# Altium PCB neuroILO_C.PcbDoc
Units mil, origin at the board's own origin, x right, y up, seen from the top; angles counter-clockwise.
Board outline 2000 x 1000 mil, 2 copper layers (Top Layer, Bottom Layer), stack 61.8 mil thick; 20 components, 11 nets, 55 pads, 136 vias.
Unrouted connection lines stored in the file: 5.
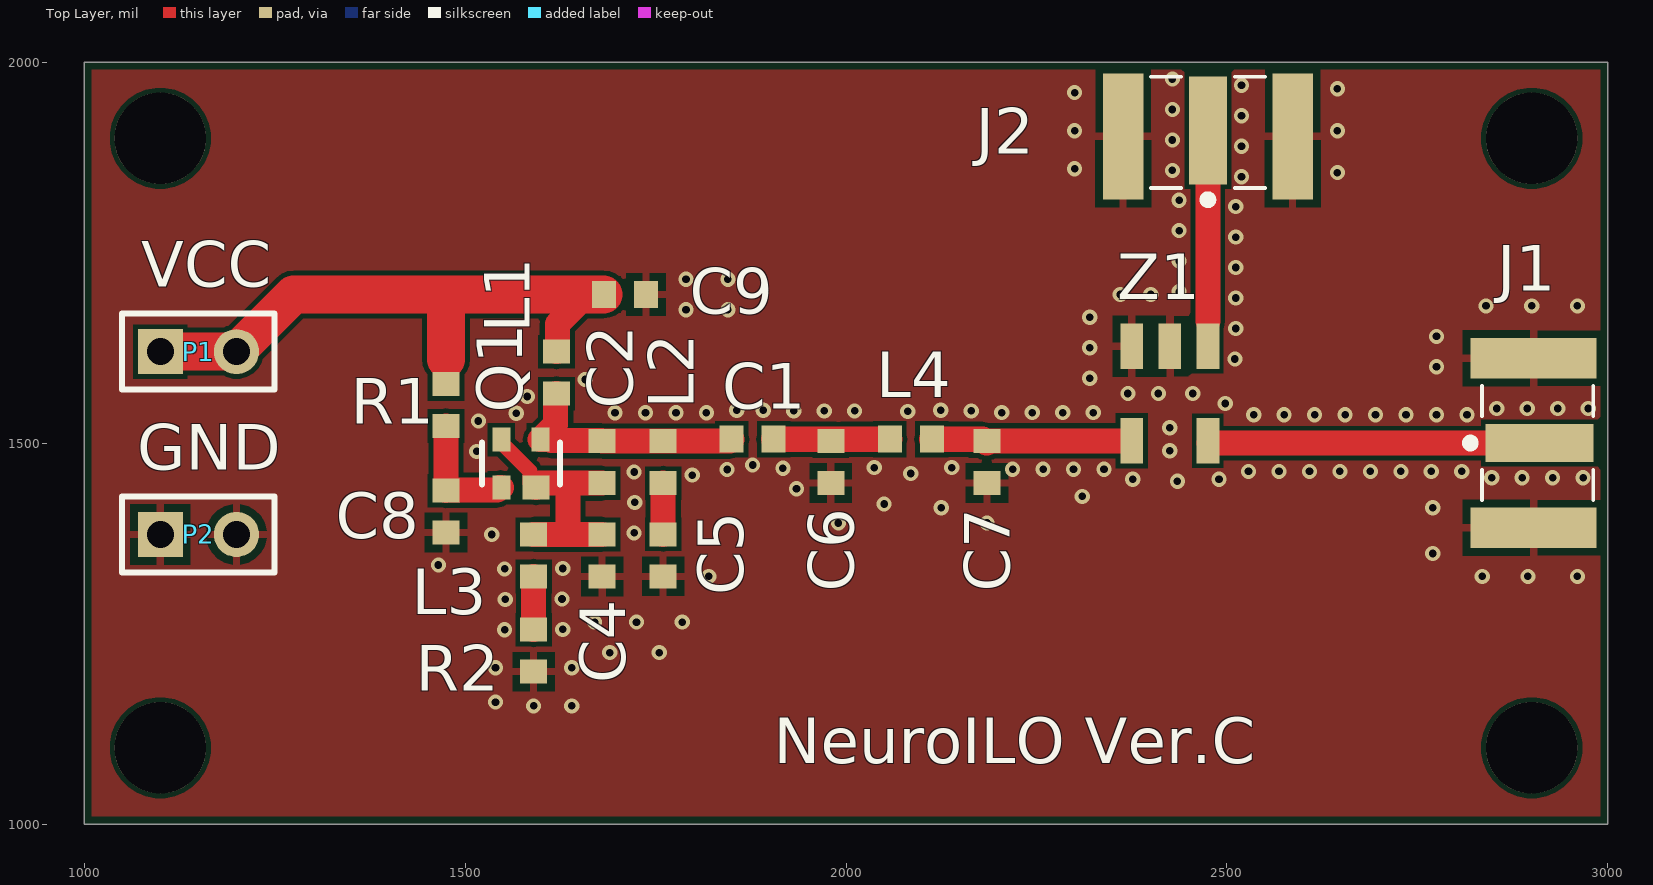
[diagram p0: Top Layer view]
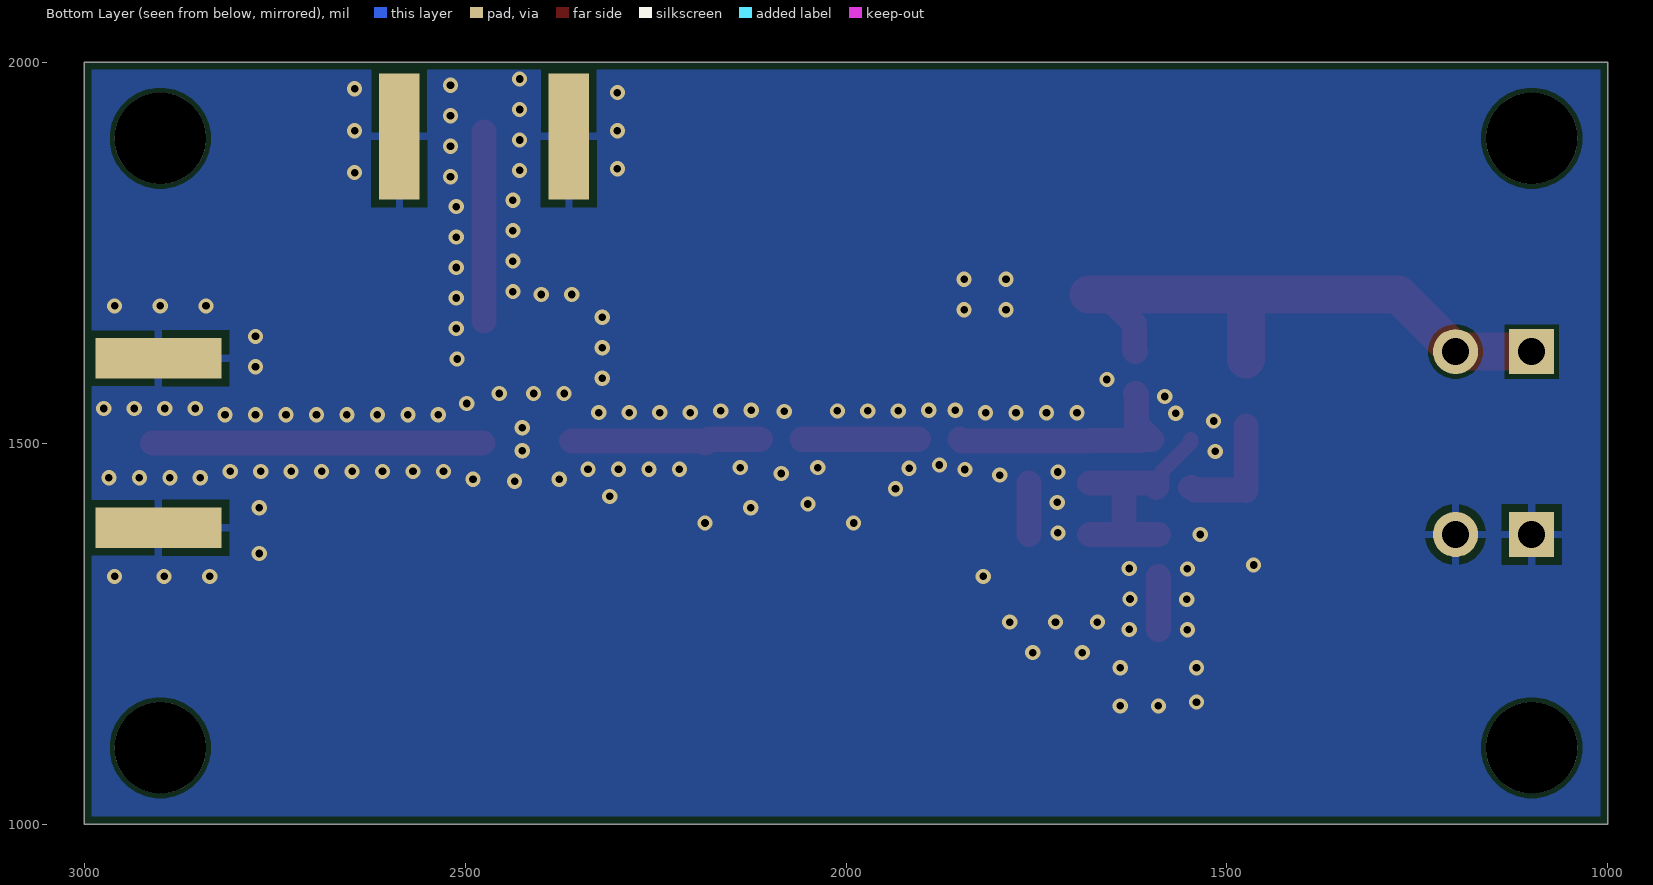
[diagram p1: Bottom Layer view, seen from below]

## Layer stack, top to bottom
Top Solder: solder mask 0.4, Solder Resist, Dk 3.5
Top Layer: signal copper 1.4
Dielectric 1: core 59, Core-043, Dk 4.3
Bottom Layer: signal copper 1.4
Bottom Solder: solder mask 0.4, Solder Resist, Dk 3.5

## Board outline
1000,1000 3000,1000 3000,2000 1000,2000

## Design rules (kind name [scope] priority, off if disabled: settings)
BoardOutlineClearance [All] p1: gap=10 ignorepadtopadclearanceinfootprint=FALSE except(0: Arc-SplitContinuation Track-SplitContinuation SMDPad-SplitContinuation THPad-SplitContinuation Via-SplitContinuation Fill-SplitContinuation Poly-SplitContinuation Region-SplitContinuation Text-SplitContinuation)
Clearance [All] p1: gap=6 ignorepadtopadclearanceinfootprint=FALSE
HoleSize [All] p1: absolutevalues=TRUE maxlimit=120 minlimit=1 maxpercent=80.000 minpercent=20.000
MinimumSolderMaskSliver [All] p1: minsoldermaskwidth=4
PolygonConnect [All] p1: thpad.connectstyle=Relief thpad.reliefconductorwidth=10 thpad.reliefentries=4 thpad.polygonreliefangle="90 Angle" thpad.airgapwidth=10 smdpad.connectstyle=Relief smdpad.reliefconductorwidth=10 smdpad.reliefentries=4 smdpad.polygonreliefangle="90 Angle" smdpad.airgapwidth=10 via.connectstyle=Direct via.reliefconductorwidth=10 via.reliefentries=4 via.polygonreliefangle="90 Angle" via.airgapwidth=10
RoutingVias [All] p1: holewidth=28 width=28 viastyle="Through Hole" minholewidth=6 minwidth=12 maxholewidth=50 maxwidth=50
SilkToSilkClearance [All] p1: silktosilkclearance=4
SilkToSolderMaskClearance [IsPad] p1: minsilkscreentomaskgap=4 clearancetoexposedcopper=TRUE
SolderMaskExpansion [All] p1: expansion=4 istentingtop=FALSE
Width [All] p1: maxlimit=80 minlimit=6 preferedwidth=33
26 further rules are at their usual default settings.

## Components (designator, comment, footprint, x,y, rotation, side; value= is the part's Value field where it differs from the comment)
C1 "1n" SMD-0603 1877.56,1505 r180 top
C2 "4.7p" SMD-0603 1680,1475 r90 top
C4 "10p" SMD-0603 1680,1352.44 r90 top
C5 "4.7p" SMD-0603 1760,1352.56 r90 top
C6 "1p_DNI" SMD-0603 1980,1475 r90 top
C7 "3p_DNI" SMD-0603 2185,1475 r90 top
C8 "1n" SMD-0603 1475,1410 r90 top
C9 "100pF" SMD-0603 1710,1695 r180 top
J1 "SMA-J-P-H-ST-EM1" SMA-J-P-H-ST-EM1 2910,1500 r90 top
J2 "SMA-J-P-H-ST-EM1" SMA-J-P-H-ST-EM1 2475,1910 r180 top
L1 "330nH" SMD-0603 1620,1592.44 r90 top
L2 "8.2nH" SMD-0603 1760,1475 r90 top
L3 "330nH" SMD-0603 1590,1352.44 r90 top
L4 "10nH" SMD-0603 2085,1505 r0 top
P1 "Header 2" HDR1X2 1100,1620 r0 top
P2 "Header 2" HDR1X2 1100,1380 r0 top
Q1 "BFP620" SOT343 1573.12,1472.99 r0 top
R1 "100k" SMD-0603 1475,1550 r90 top
R2 "750" SMD-0603 1590,1227.56 r90 top
Z1 "SBTC-2-10L+" AT1029 2425,1565 r0 top

## Footprints (in the part's own frame and the unit in brackets; to place one, negate y for a bottom-side part, rotate by r counter-clockwise, add the part's x,y. Pads: shape width x height; smd on the part's side, far side on the other; paste and mask are expansions set on the pad)
AT1029 [mil]
  rect 30x60 smd mask+2: 1(-50,62) 2(0,62) 3(50,62) 4(50,-62) 6(-50,-62)
HDR1X2 [mm] "Connector; Header; 2 Position"
  rect 1.5x1.5 hole 0.9: 1(0,0)
  round 1.5 hole 0.9: 2(2.54,0)
  silkscreen extent -1.27,-1.27 3.81,1.27
SMA-J-P-H-ST-EM1 [mm] "SMA-J-P-H-ST-EM1"
  rect 1.27x3.6 smd: 1(0,0)
  rect 1.35x4.2 smd: 2_1(-2.825,0.2) 3_1(2.825,0.2)
  rect 1.35x4.2 smd far side: 2_2(-2.825,0.2) 3_2(2.825,0.2)
  silkscreen extent -1.9,-1.8 1.9,2.44
SMD-0603 [mm] "SMD Body 1.6x0.8mm, IPC High Density"
  rect 0.8x0.9 smd: 1(-0.7,0) 2(0.7,0)
  body extent -0.87,-0.48 0.87,0.48, height 1.3
SOT343 [mm]
  rect 0.6x0.8 smd: 1(-0.65,-0.8) 3(0.65,0.8) 4(-0.65,0.8)
  rect 0.9x0.8 smd: 2(0.5,-0.8)
  silkscreen extent -1.3,-0.7 1.3,0.7

## Part data
C1 C2 C4 C5 C6 C7 C8 C9: library part CAP0603, "Ceramic Capacitor 0603"
J1 J2: "Connector SMA F 50Ohm Solder ST Edge Mount Gold Over Nickel Tray", Package=None, Availability=Unavailable, MF=Samtec, MP=SMA-J-P-H-ST-EM1, Price=None, SnapEDA_Link=https://www.snapeda.com/parts/SMA-J-P-H-ST-EM1/Samtec%20Inc./view-part/?ref=snap
L1 L2 L3 L4: library part L0603, "Inductor 0603"
P1 P2: "Header, 2-Pin", LatestRevisionDate=17-Jul-2002, LatestRevisionNote="Re-released for DXP Platform.", Publisher="Altium Limited"
Q1: "Trans RF BJT NPN 2.3V 0.08A 185mW Automotive 4-Pin(3+Tab) SOT-343 T/R", Package=None, Availability="In Stock", Check_prices=https://www.snapeda.com/parts/BFP620/Infineon+Technologies/view-part/?ref=eda, MF="Infineon Technologies", MP=BFP620, Price=None, Purchase-URL=https://pricing.snapeda.com/search/part/BFP620/?ref=eda, SnapEDA_Link=https://www.snapeda.com/parts/BFP620/Infineon+Technologies/view-part/?ref=snap
R1 R2: library part RES0603, "Resistor-0603"
Z1: "Power Divider, 2 Way-0 , 0.005 to 1.0 GHz, 50 ohms, SMT", Package=None, Availability=Warning, Check_prices=https://www.snapeda.com/parts/SBTC-2-10L+/Mini-Circuits/view-part/564803/?ref=eda, MF=Mini-Circuits, MP=SBTC-2-10L+, Price=None, Purchase-URL=https://pricing.snapeda.com/search/part/SBTC-2-10L+/?ref=eda, SnapEDA_Link=https://www.snapeda.com/parts/SBTC-2-10L+/Mini-Circuits/view-part/564803/?ref=snap

## Free pads (board coordinates)
  round 120 hole 120 unplated: 1(1100,1100) 1(1100,1900) 1(2900,1100) 1(2900,1900)

## Via types
v1: diameter 20, hole 10, Top Layer to Bottom Layer, tented both sides, 136 vias

## Nets (pads, with @x,y where several pads share a name; then routed paths per layer and width w, separated by ;. In a path a pad name is that pad's centre, name@x,y a point inside that pad or via, vN(x,y) a via of type N, cw(c..) or ccw(c..) an arc to the next point about the centre after c; other vN are vias at no path point)
0V9: C9.2 L1.2 P1.1 P1.2 R1.2 | length 795
  Top Layer w33: L1.2 1620.46,1620 1621.22,1620.75 1621.22,1656.22 1658.78,1693.78 ; C9.2@1681.98,1695 C9.2@1682.44,1694.54
  Top Layer w50: P1.1 P1.2 1275,1695 1460,1695 ; 1475,1610 1475,1680 1460,1695 ; C9.2@1681.98,1695 1460,1695
GND: C4.1 C5.1 C6.1 C7.1 C8.1 C9.1 J1.2_1 J1.2_2 J1.3_1 J1.3_2 J2.2_1 J2.2_2 J2.3_1 J2.3_2 P2.1 P2.2 R2.1 Z1.1 Z1.2
  other v1: 1590,1155 1640,1155 1540,1160 1540,1205 1640,1205 1690,1225 1755,1225 1551.89,1254.8 1628.11,1255.39 1670,1265 1725,1265 1785,1265 1552.78,1294.79 1627.22,1295.38 1820,1325 2835,1325 2895,1325 2960,1325 1551.89,1334.78 1628.11,1335.37 1465,1340 2770,1355 1535,1380 1721.89,1382.06 1990,1395 2185,1395 2125,1415 2770,1415 2050,1420 1722.78,1422.05 2310,1430 1935,1440 2435,1450 2376.51,1452.61 2489.58,1452.61 2847.42,1454.61 2887.42,1454.61 2927.42,1454.61 2967.42,1454.61 1798.11,1457.93 2085,1460 1721.89,1462.04 2528.27,1462.78 2568.27,1462.78 2608.27,1462.78 2648.27,1462.78 2688.27,1462.78 2728.27,1462.78 2768.27,1462.78 2808.27,1462.78 1843.93,1465.34 2218.67,1465.56 2258.67,1465.56 2298.67,1465.56 2338.67,1465.56 1917.17,1466.89 2037.13,1467.79 2138.95,1467.79 1877.41,1471.22 1515.32,1489.03 2425,1490 2425,1520 1517.5,1528.97 2535.03,1537.22 2575.03,1537.22 2615.03,1537.22 2655.03,1537.22 2695.03,1537.22 2735.03,1537.22 2775.03,1537.22 2815.03,1537.22 1567.14,1539.07 1696.81,1539.77 1736.81,1539.77 1776.81,1539.77 1816.81,1539.77 2204.41,1539.99 2244.41,1539.99 2284.41,1539.99 2324.41,1539.99 1931.31,1542.22 1971.31,1542.22 2011.31,1542.22 2080.99,1541.56 2164.47,1542.22 1856.67,1543.11 1891.32,1543.11 2124.48,1543.11 2854.19,1545.39 2894.19,1545.39 2934.19,1545.39 2974.19,1545.39 2497.8,1551.84 1581.57,1561.06 2370,1565 2410,1565 2455,1565 1657.55,1583.43 2320,1585 2775,1600 2510.39,1610.35 2320,1625 2775,1640 2511.6,1650.33 2320,1665 1790,1675 1845,1675 2840,1680 2900,1680 2960,1680 2511.6,1690.33 2360,1695 2400,1695 2437.17,1698.8 1790,1715 1845,1715 2511.6,1730.33 2437.17,1738.8 2511.6,1770.33 2437.17,1778.8 2511.6,1810.33 2437.17,1818.8 2519.17,1849.61 2645,1855 2428.39,1857.83 2300,1860 2519.17,1889.61 2428.39,1897.83 2300,1910 2645,1910 2519.17,1929.61 2428.39,1937.83 2300,1960 2645,1965 2519.17,1969.61 2428.39,1977.83
NetC1_1: C1.1 C6.2 L4.1 | length 146.5
  Top Layer w33: C1.1 C6.2@1987.09,1505 ; C6.2@1992.91,1505 L4.1
NetC1_2: C1.2 C2.2 L1.1 L2.2 Q1.3 | length 322.9
  Top Layer w33: L1.1 1619.54,1564.88 1618.78,1564.13 1618.78,1524.56 Q1.3 1611.61,1504.49 1612.78,1503.31 1679.25,1503.31 C2.2 L2.2 1848.02,1502.56 1850,1504.54 C1.2
NetC2_1: C2.1 C4.2 L3.2 Q1.2 Q1.4 | length 330
  Top Layer w20: Q1.4 1547.53,1500.55 1585.09,1462.99 1585.09,1447.24 1590.83,1441.49 Q1.2
  Top Layer w33: L3.2 1635,1380 ; Q1.2 1593.27,1441.49 1599.21,1447.44 1635,1447.44 ; C4.2 1635,1380 ; C2.1 1635,1447.44 ; 1635,1380 1635,1447.44
NetC5_2: C5.2 L2.1 | length 67.3
  Top Layer w33: C5.2 L2.1
NetC7_2: C7.2 L4.2 Z1.6 | length 249.6
  Top Layer w33: L4.2 2179.54,1505 2184.54,1500 C7.2@2185,1500 ; C7.2 2185.22,1502.78 Z1.6@2360,1502.78
NetC8_2: C8.2 Q1.1 R1.1 | length 159
  Top Layer w33: R1.1 C8.2 1475.75,1438.31 1542.22,1438.31 1545.4,1441.49 Q1.1
NetJ1_1: J1.1 Z1.4 | length 433.5
  Top Layer w33: Z1.4@2476.5,1500 J1.1
NetJ2_1: J2.1 Z1.3 | length 248
  Top Layer w33: 2475,1660 J2.1@2475,1908
NetL3_1: L3.1 R2.2 | length 69.8
  Top Layer w33: R2.2 L3.1

## Polygon pours and split planes (outlines as drawn)
GND on Bottom Layer "GND_L02_P003" (solid, pour order 3): 1000,1000 3000,1000 3000,2000 1000,2000
GND on Top Layer "GND_L01_P002" (solid, pour order 2): 1000,1000 3000,1000 3000,2000 1000,2000

## Silkscreen, mask and mechanical layers (free items; w line width, h text height)
Top Overlay:
  text "VCC" at 1075,1705 h60
  text "GND" at 1070,1465 h60
  text "NeuroILO Ver.C" at 1905,1080 h60